# Altium PCB Candunio.PcbDoc (part 2 of 2)
Units mm, origin at the board's own origin, x right, y up, seen from the top; angles counter-clockwise.
Board outline 46 x 46 mm, 2 copper layers (Top Layer, Bottom Layer); 50 components, 55 nets, 199 pads, 108 vias.
Unrouted connection lines stored in the file: 10.
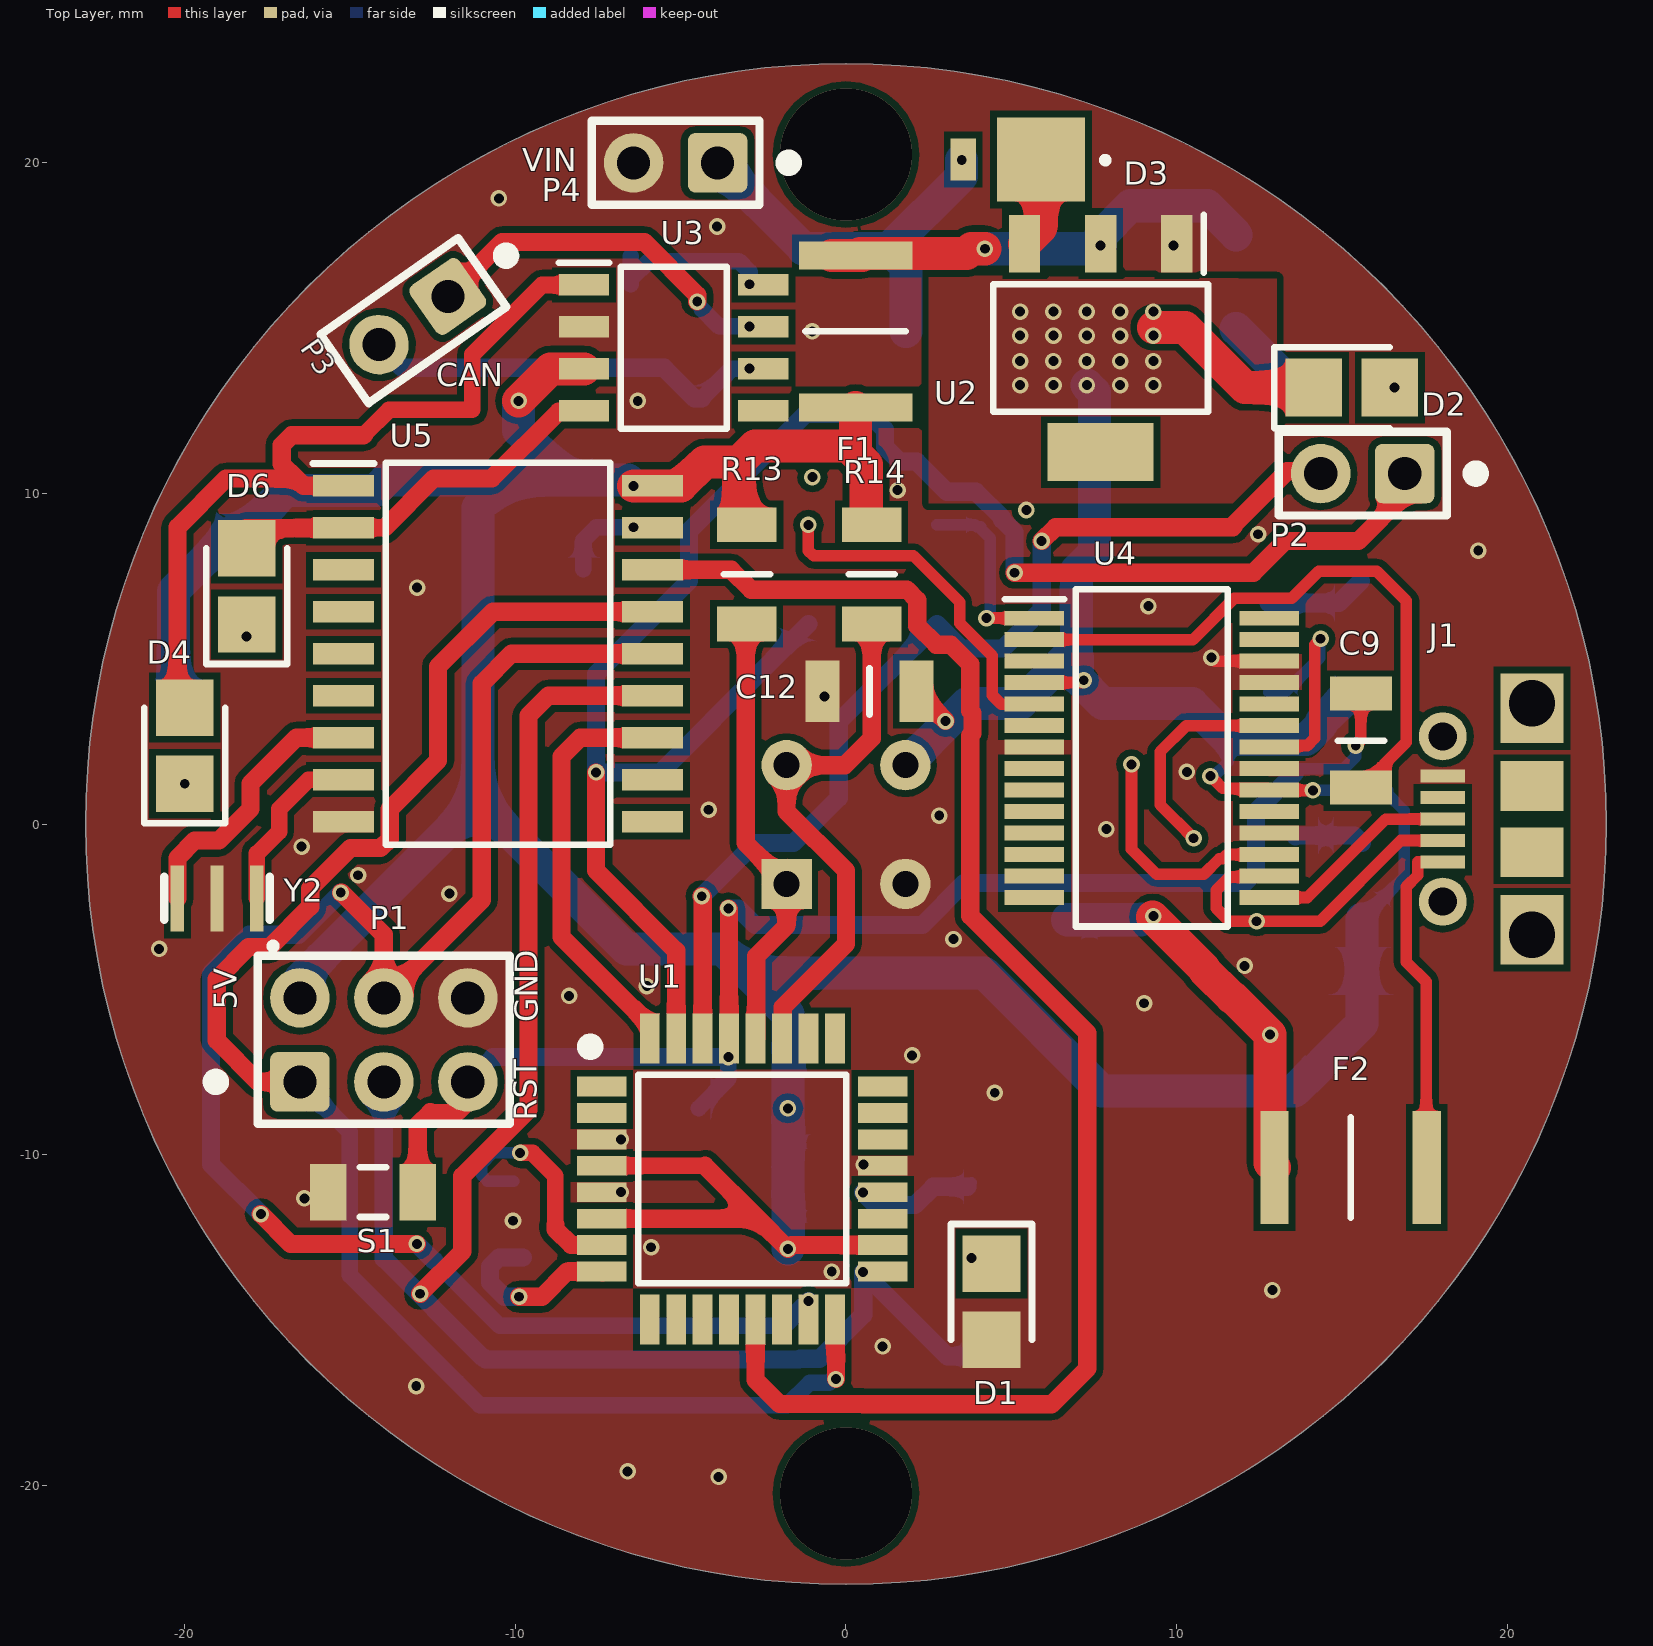
[diagram p0: Top Layer view]

## Via types
v1: diameter 0.5, hole 0.3, Top Layer to Bottom Layer, tented both sides, 104 vias
v2: diameter 0.5, hole 0.3, Top Layer to Bottom Layer, 2 vias
v3: diameter 4, hole 4, Top Layer to Bottom Layer, 2 vias

## Nets (pads, with @x,y where several pads share a name; then routed paths per layer and width w, separated by ;. In a path a pad name is that pad's centre, name@x,y a point inside that pad or via, vN(x,y) a via of type N, cw(c..) or ccw(c..) an arc to the next point about the centre after c; other vN are vias at no path point) (continued)
+5V: (continued)
  Bottom Layer w1: R7.1 -20.345,3.825 -20.345,7.038 R10.2@-18.508,8.875 ; R10.2 -16.968,10.085 -14.236,10.085 -13.921,10.4 -10.3,10.4 ; P1.4 -16.521,-4.691 -11.125,0.705 ; v1(-9.9,12.8) -9.9,11.904 R9.2@-8.771,10.775 ; v1(-6.425,10.225) -6.6,10.4 -10.3,10.4 ; v1(-1.756,-12.85) v1(-1.756,-8.6) -1.756,-5.75 -3,-4.506 ; U6.3 3.657,3.64 5.276,3.64 C7.1 ; C7.1@6.972,4.855 6.972,7.66 C6.1 7.511,13.048 v1(7.284,13.275) ; C7.1@7.009,5.034 7.009,4.403 7.772,3.64 10.464,3.64 11.127,2.977 11.554,2.55 13.918,2.55 14.387,3.018 14.387,3.1 15.136,3.85 D8.1@15.575,3.85 ; D7.1 15.605,-6.036 D5.1 13.564,-8.077 7.747,-8.077 4.176,-4.506 -3,-4.506 ; -11.125,0.705 -11.125,9.575 -10.3,10.4 ; -11.125,0.705 -6.645,-3.775 -3.731,-3.775 -3,-4.506
  other v1: 5.454,9.497 5.268,13.275 6.276,13.275 8.292,13.275 9.3,13.275 5.266,14 6.274,14 7.282,14 8.29,14 9.298,14 5.268,14.775 6.276,14.775 7.284,14.775 8.292,14.775 9.3,14.775 5.266,15.5 6.274,15.5 7.282,15.5 8.29,15.5 9.298,15.5
+12V: C4.1 D3.2 P4.1 | length 12.6
  Bottom Layer w1: P4.1 -1.3,17.415 -1.3,17.4 1.3,17.4 ; C4.1 1.812,14.908 1.812,16.888 1.3,17.4 ; v2(3.5,20.081) 3.5,19.6 1.3,17.4
ADC0: U1.23
ADC1: U1.24
ADC2: U1.25
ADC3: U1.26
ADC6: U1.19
ADC7: U1.22
CANH: P3.1 R8.1 U3.7 | length 11.1
  Top Layer w0.55: P3.1@-11.693,15.957 P3.1 -10.401,17.6 -6.1,17.6 -4.5,16 v2(-4.5,15.8)
  Bottom Layer w0.5: R8.1@-4.363,15.575 -3.838,15.05 v1(-2.913,15.05)
CANL: P3.2 R8.2 U3.6 | length 12.3
  Bottom Layer w0.5: R8.2@-4.363,12.875 -3.463,13.775 v1(-2.913,13.775)
  Bottom Layer w0.55: P3.2 -13.425,13.8 -5.5,13.8 -4.575,12.875 R8.2@-4.363,12.875
D0/RXD: P2.2 R2.1 U1.30 | length 31.6
  Top Layer w0.55: v1(-4.363,-2.184) -4.333,-2.214 -4.333,-5.36 ; U1.30@-4.337,-6.538 -4.337,-5.36 ; v1(5.918,8.56) 6.333,8.975 11.698,8.975 11.739,9.016 11.739,9.063 13.344,10.668 14.292,10.668 P2.2
  Bottom Layer w0.55: v1(-4.363,-2.184) -2.755,-0.576 -1.587,-0.576 -0.221,0.79 -0.221,3.078 R2.1 3.49,5.309 4.75,5.309 5.918,6.477 v1(5.918,8.56)
D1/TXD: P2.1 R3.1 U1.31 | length 53.8
  Top Layer w0.55: v1(-7.561,1.561) -7.561,-1.411 -5.137,-3.835 U1.31@-5.137,-6.538 ; v1(5.1,7.6) 12.326,7.6 13.286,8.56 15.5,8.56 16.9,9.96 P2.1
  Bottom Layer w0.55: R3.1 -4,3.186 -4,3.175 -5.614,1.561 v1(-7.561,1.561) -7.561,4.538 -4.75,7.349 -4.75,8.865 -1.204,12.411 0.689,12.411 1.175,11.925 1.175,11.4 1.614,10.961 2.139,10.961 3.051,10.049 3.929,10.049 4.729,9.25 4.729,9.197 5.1,8.826 v1(5.1,7.6) ; P2.1@16.8,10.7 P2.1
D2/INTCAN: U1.32 U5.12 | length 12.7
  Top Layer w0.55: U1.32 -5.937,-6.078 -8.602,-3.413 -8.602,2.043 -8.036,2.61 U5.12@-5.725,2.61
D3: U1.1
D4: U1.2
D5: U1.9
D6: U1.10
D7: U1.11
D8: U1.12
D9/CS: U1.13 U5.16 | length 46.7
  Top Layer w0.55: U5.16 -3.474,7.69 -2.87,7.087 1.839,7.087 2.155,6.771 2.155,5.999 2.73,5.423 3.167,5.423 3.759,4.831 3.759,3.423 3.823,3.359 3.823,2.737 3.759,2.673 3.759,-2.783 7.299,-6.323 7.299,-16.471 6.219,-17.551 0.51,-17.551 0.498,-17.539 -2.012,-17.539 -2.737,-16.815 U1.13@-2.737,-14.938
D10: U1.14
D11/MOSI: P1.5 U1.15 U5.14 | length 51.3
  Top Layer w0.55: v1(-17.7,-11.8) -16.8,-12.7 v1(-12.981,-12.7) ; v1@-15.277,-2.079 -15.271,-2.074 -15.259,-2.074 -13.981,-3.351 P1.5 -11.015,-2.294 -11.015,4.253 -10.118,5.15 U5.14@-5.725,5.15
  Bottom Layer w0.5: -12.452,-13.204 -10.477,-15.179 -1.885,-15.179
  Bottom Layer w0.55: v1(-17.7,-11.8) -19.206,-10.294 -19.206,-4.504 -18.052,-3.35 -16.559,-3.35 v1(-15.282,-2.074) ; v1(-12.981,-12.7) -12.477,-13.204 -12.452,-13.204 ; -1.885,-15.179 v1(-1.131,-14.425)
D12/MISO: P1.1 U1.16 U5.15 | length 50.3
  Top Layer w0.55: P1.1 -17.781,-7.8 -19.031,-6.55 -19.031,-4.69 -18.066,-3.725 -17.428,-3.725 -16.205,-2.502 -16.205,-1.947 -14.988,-0.73 -14.078,-0.73 -13.8,-0.452 -13.8,0.458 -12.336,1.922 -12.336,4.761 -10.677,6.42 U5.15@-5.725,6.42 ; U1.16@-0.337,-14.938 -0.305,-14.97 v1(-0.305,-16.789)
  Bottom Layer w0.5: P1.1 -15.006,-9.315 -15.006,-13.65 -11.765,-16.891 -11.079,-17.577 -1.772,-17.577 -1.096,-16.9 -0.506,-16.9 -0.395,-16.789 v1(-0.305,-16.789)
D13/SCK: P1.2 R5.2 U1.17 U5.13 | length 50.3
  Top Layer w0.55: v1(-12.88,-14.208) -11.606,-12.934 -11.606,-10.648 -9.603,-8.645 -9.603,3.277 -9.001,3.88 U5.13@-5.725,3.88
  Bottom Layer w0.55: P1.2 -13.981,-13.15 -10.99,-16.141 -10.955,-16.141 -10.896,-16.2 -1.421,-16.2 -1.396,-16.175 -0.806,-16.175 0.519,-14.85 v1(0.519,-13.55) 3.069,-16.1 R5.2@3.794,-16.1
GND: C1.2 C2.2 C3.2 C4.2 C5.1 C6.2 C7.2 C8.2 C10.2 C11.2 C12.1 D1.2 J1.5 P1.6 P4.2 R4.2 R6.1 S1.2 U1.3 U1.5 U1.21 U2.1 U3.2 U4.7 U4.18 U4.21 U4.25 U4.26 U5.9 U6.4 Y1.2 Y2.2 | length 4.5
  Top Layer w0.35: v1(11.051,5.034) 11.16,4.925 U4.26@12.7,4.925
  Bottom Layer w1: C5.1 13.575,13.205 R4.2 R4.2@13.564,13.316
  other v1: -3.856,-19.75 -6.604,-19.583 -13,-17 1.105,-15.8 12.9,-14.097 -0.431,-13.538 -5.893,-12.802 -10.073,-12 -16.381,-11.326 -6.809,-11.134 0.533,-10.305 -6.807,-9.538 4.5,-8.13 2,-7 9.018,-5.421 -8.378,-5.2 -6.02,-4.902 12.055,-4.293 -20.775,-3.775 3.251,-3.48 -11.996,-2.108 -14.757,-1.549 -16.465,-0.686 7.874,-0.152 2.819,0.254 -4.158,0.43 10.312,1.575 -0.647,3.861 9.146,6.59 -12.975,7.15 19.125,8.271 12.464,8.763 1.563,10.1 -6.3,12.8 -1.02,14.9 9.9,17.5 -3.9,18.073 -10.5,18.925
NetC3_1: C3.1 U1.20 | length 3.7
  Bottom Layer w0.35: C3.1@3.669,-10.975 C3.1@3.794,-10.85
  Bottom Layer w0.55: v1(0.519,-11.15) 0.898,-11.529 2.088,-11.529 2.642,-10.975 C3.1@3.669,-10.975
NetC5_2: C5.2 F1.1 U2.2 | length 13.5
  Top Layer w1: F1.1@-0.431,17.2 F1.1 0.48,17.2 0.43,17.25 3.65,17.25 3.8,17.4 v1(4.2,17.4)
  Bottom Layer w1: v1(4.2,17.4) 7.6,17.4 v1(7.7,17.5) 7.7,17.8 8.6,18.7 10.92,18.7 C5.2
NetC9_2: C9.2 U4.2 | length 18.7
  Top Layer w0.35: U4.2 10.495,5.575 11.745,6.825 13.48,6.825 14.3,7.645 16.053,7.645 16.95,6.748 16.95,2.478 C9.2
NetD1_1: D1.1 R5.1
  other v1: 3.794,-13.125
NetD2_2: D2.2 R4.1
  other v1: 16.592,13.2
NetD3_1: D3.1 U2.3 | length 3.2
  Top Layer w1: U2.3 5.9,18.05 5.9,20 D3.1@6.3,20.4
NetD4_1: D4.1 R7.2
  other v1: -20,1.217
NetD4_2: D4.2 U3.1 U5.1 | length 24.7
  Top Layer w0.5: -14.572,11.778 -13.826,12.524 -11.299,12.524 -11.299,14.201 -9.195,16.305 U3.1@-8.013,16.305
  Top Layer w0.55: D4.2 -20.225,3.742 -20.225,8.975 -18.75,10.45 -16.625,10.45 ; U5.1@-14.986,10.23 U5.1 -16.405,10.23 -16.625,10.45 ; -14.572,11.778 -14.59,11.76 -16.764,11.76 -17.069,11.455 -17.069,10.894 -16.625,10.45
NetD6_1: D6.1 R10.1
  other v1: -18.128,5.675
NetD6_2: D6.2 U3.4 U5.2 | length 12.2
  Top Layer w0.5: U5.2 -13.965,8.96
  Top Layer w0.55: D6.2@-18.139,8.954 U5.2@-15.327,8.954 ; D6.2@-18.128,8.575 D6.2@-17.688,8.135 ; -13.965,8.96 -12.475,10.45 -10.717,10.45 -8.7,12.467 -7.952,12.467 U3.4
NetD7_2: D7.2 R11.2 | length 2.1
  Bottom Layer w0.55: R11.2@13.595,-0.376 13.62,-0.35 R11.2 15.381,-0.35 D7.2
NetD8_2: D8.2 R12.2 | length 3.1
  Bottom Layer w0.55: R12.2@12.787,6.683 14.908,6.683 D8.2@15.575,7.35
NetF2_2: F2.2 J1.1 | length 10.4
  Top Layer w0.35: F2.2 17.551,-10.375 17.551,-4.775 16.95,-4.174 16.95,-1.894 17.3,-1.544 17.3,-1.15 J1.1
NetR6_2: R6.2 U3.8 | length 5.2
  Bottom Layer w0.5: -6.513,16.325 -6.513,16.475 ; -6.513,17.175 -6.513,16.475 ; v1(-2.913,16.325) -2.913,16.7 -3.238,17.025 -5.963,17.025 -6.513,16.475
NetR9_1: R9.1 U5.17 | length 2.6
  Bottom Layer w0.5: R9.1@-7.95,7.7 -7.95,8.575 -7.55,8.975 v1(-6.425,8.975)
NetR11_1: R11.1 U4.23 | length 6.6
  Top Layer w0.35: v1(10.516,-0.432) 9.5,0.584 9.5,2.184 10.29,2.975 U4.23@12.7,2.975
NetR12_1: R12.1 U4.22 | length 7.2
  Top Layer w0.35: U4.22@12.7,2.325 12.746,2.371 13.95,2.371 14.179,2.6 14.179,5.425 v1(14.358,5.604)
  Bottom Layer w0.35: R12.1@12.787,3.983 13.277,3.983 14.325,5.032 14.325,5.571 v1(14.358,5.604)
NetU1_7: U1.7 Y1.1 | length 7.3
  Top Layer w0.5: v1(-9.856,-9.95) -9.481,-9.95 -8.788,-10.643 -8.788,-12.116
  Top Layer w0.55: -8.788,-12.116 -8.788,-12.258 -8.309,-12.738 U1.7 U1.7@-7.337,-12.738
  Bottom Layer w0.35: Y1.1@-10.056,-10.799 -10.846,-10.799 -11.019,-10.626 -11.019,-10.287 -10.682,-9.95 v1(-9.856,-9.95)
NetU1_8: U1.8 Y1.3 | length 5.5
  Top Layer w0.55: v1(-9.887,-14.3) -9.195,-14.3 -8.433,-13.538 U1.8 ; U1.8@-7.362,-13.563 U1.8@-7.337,-13.538
  Bottom Layer w0.55: v1(-9.887,-14.3) -10.331,-14.3 -10.77,-13.861 -10.77,-13.386 -10.496,-13.113 Y1.3
NetU5_7: U5.7 Y2.3 | length 8.2
  Top Layer w0.55: Y2.3 -20.225,-1.025 -19.7,-0.5 -18.962,-0.5 -18.009,0.453 -18.009,1.226 -16.625,2.61 U5.7
NetU5_8: U5.8 Y2.1 | length 5.3
  Top Layer w0.5: Y2.1 -17.825,-0.883 -17.8,-0.883 -17.145,-0.229 -17.145,0.453 -16.258,1.34 U5.8
RESET: C9.1 P1.3 R1.2 S1.1 U1.29 | length 42.8
  Top Layer w0.35: v1(15.42,2.367) 15.575,2.523 C9.1
  Top Layer w0.5: -12.575,-8.721 -11.727,-8.721 P1.3@-11.441,-8.435
  Top Layer w0.55: S1.1 -12.956,-9.102 -12.575,-8.721 ; P1.3@-11.441,-8.435 P1.3 ; v1(-3.556,-2.551) -3.537,-2.57 U1.29
  Bottom Layer w0.35: 13.574,1.549 13.7,1.675 15.058,1.675 15.42,2.037 v1(15.42,2.367)
  Bottom Layer w0.5: P1.3 -10.691,-7.05 ; R1.2@-4.456,-8.6 -3.556,-7.7 v1(-3.556,-7.05)
  Bottom Layer w0.55: -10.691,-7.05 v1(-3.556,-7.05) ; v1(-3.556,-2.551) -3.254,-2.551 -2.755,-3.05 2.308,-3.05 3.574,-1.785 12.055,-1.785 12.397,-1.443 12.397,0.372 12.77,0.745 ; 12.77,0.746 13.048,1.025 ; 13.05,1.025 13.574,1.549
RXD: R2.2 U4.1 | length 5.7
  Top Layer w0.35: v1(4.25,6.225) U4.1
  Bottom Layer w0.35: R2.2 3.893,9.049 3.95,8.992 4.068,8.992 4.079,8.98 4.079,8.928 4.358,8.648 4.358,6.333 v1(4.25,6.225)
SCL/ADC5: R13.1 U1.28 U6.1 | length 13.5
  Top Layer w0.55: R13.1 -3.033,6.016 -3.033,-0.576 U6.1 -1.796,-3.084 -2.712,-4 -2.712,-6.463 U1.28
SDA/ADC4: R14.1 U1.27 U6.2 | length 16.2
  Top Layer w0.55: U1.27 -1.912,-6.463 -1.912,-5.541 0,-3.629 0,-1.414 -1.796,0.382 U6.2 -0.036,1.779 0.78,2.595 R14.1
TXD: R3.2 U4.5 | length 10.7
  Top Layer w0.35: v1(-1.137,9.049) -1.137,8.268 -0.979,8.11 2.04,8.11 3.438,6.712 3.438,6.072 4.425,5.085 4.425,3.895 4.695,3.625 U4.5 U4.5@5.8,3.625
USBD+: J1.3 U4.15 | length 6.3
  Top Layer w0.35: U4.15@12.7,-2.225 13.955,-2.225 16.33,0.15 J1.3
USBD-: J1.2 U4.16 | length 10.3
  Top Layer w0.35: U4.16@12.7,-1.575 12.667,-1.608 11.588,-1.608 11.194,-2.001 11.194,-2.551 11.584,-2.941 v1(12.423,-2.941) 14.343,-2.941 16.784,-0.5 J1.2
VUSB: C10.1 C11.1 D5.2 F2.1 | length 11.4
  Top Layer w1: v1@9.273,-2.814 10.825,-4.366 10.825,-4.406 11.661,-5.243 11.701,-5.243 v1(12.827,-6.368) 12.827,-10.25 F2.1
  Bottom Layer w1: C11.1@6.696,-2.895 8.908,-2.895 C10.1@8.931,-2.873
  other v1: 9.298,-2.789
pads on no net: J1.0 J1.4 U2.4 U3.5 U4.3 U4.6 U4.8 U4.9 U4.10 U4.11 U4.12 U4.13 U4.14 U4.19 U4.24 U4.27 U4.28 U5.3 U5.4 U5.5 U5.6 U5.10 U5.11
copper on no net:
  other v1: -1.016,10.49
  other v3: 0,-20.25 0,20.25

## Polygon pours and split planes (outlines as drawn)
GND on Top Layer "Top Layer-GND" (solid, pour order 25): -23,0 cw(c0,0) 0,23 cw(c0,0) 23,0 cw(c0,0) 0,-23 cw(c0,0) -23,0
+5V on Top Layer "Top 5V HeatSink" (solid, pour order 24): 2.5,9.7 2.5,16.6 13.027,16.5 13.027,9.7
GND on Bottom Layer "Bottom Layer-GND" (solid, pour order 26): -23,0 cw(c0,0) 0,23 cw(c0,0) 23,0 cw(c0,0) 0,-23 cw(c0,0) -23,0
+5V on Bottom Layer "Bottom 5V HeatSink" (solid, pour order 23): 2.5,9.7 2.5,16.6 13.027,16.5 13.027,9.7

## Silkscreen, mask and mechanical layers (free items; w line width, h text height)
Top Overlay:
  text "VIN" at -9.8,19.5 h1.2
  text "CAN" at -12.4,13 h1.2
  text "5V" at -18.181,-5.625 h1.2 r90
  text "GND" at -9.081,-6 h1.2 r90
  text "RST" at -9.109,-8.975 h1.2 r90
Bottom Overlay:
  drawing of 37 lines, arcs and shapes, not listed
  text "BRAKE TEMP SENSE V1 /           Jules G. Pare /            Akshdeep M" at -5.975,-0.017 h1.2
Mechanical 1:
  circle w0.1: c0,0 r23
  lines w0.254: 2.5,9.7 13.027,9.7 13.027,16.5 2.5,16.6 2.5,9.7